# Altium PCB www.PcbDoc
Units mm, origin at the board's own origin, x right, y up, seen from the top; angles counter-clockwise.
Board outline 201.17 x 150.24 mm, 2 copper layers (Top Layer, Bottom Layer); 52 components, 72 nets, 248 pads, 0 vias.
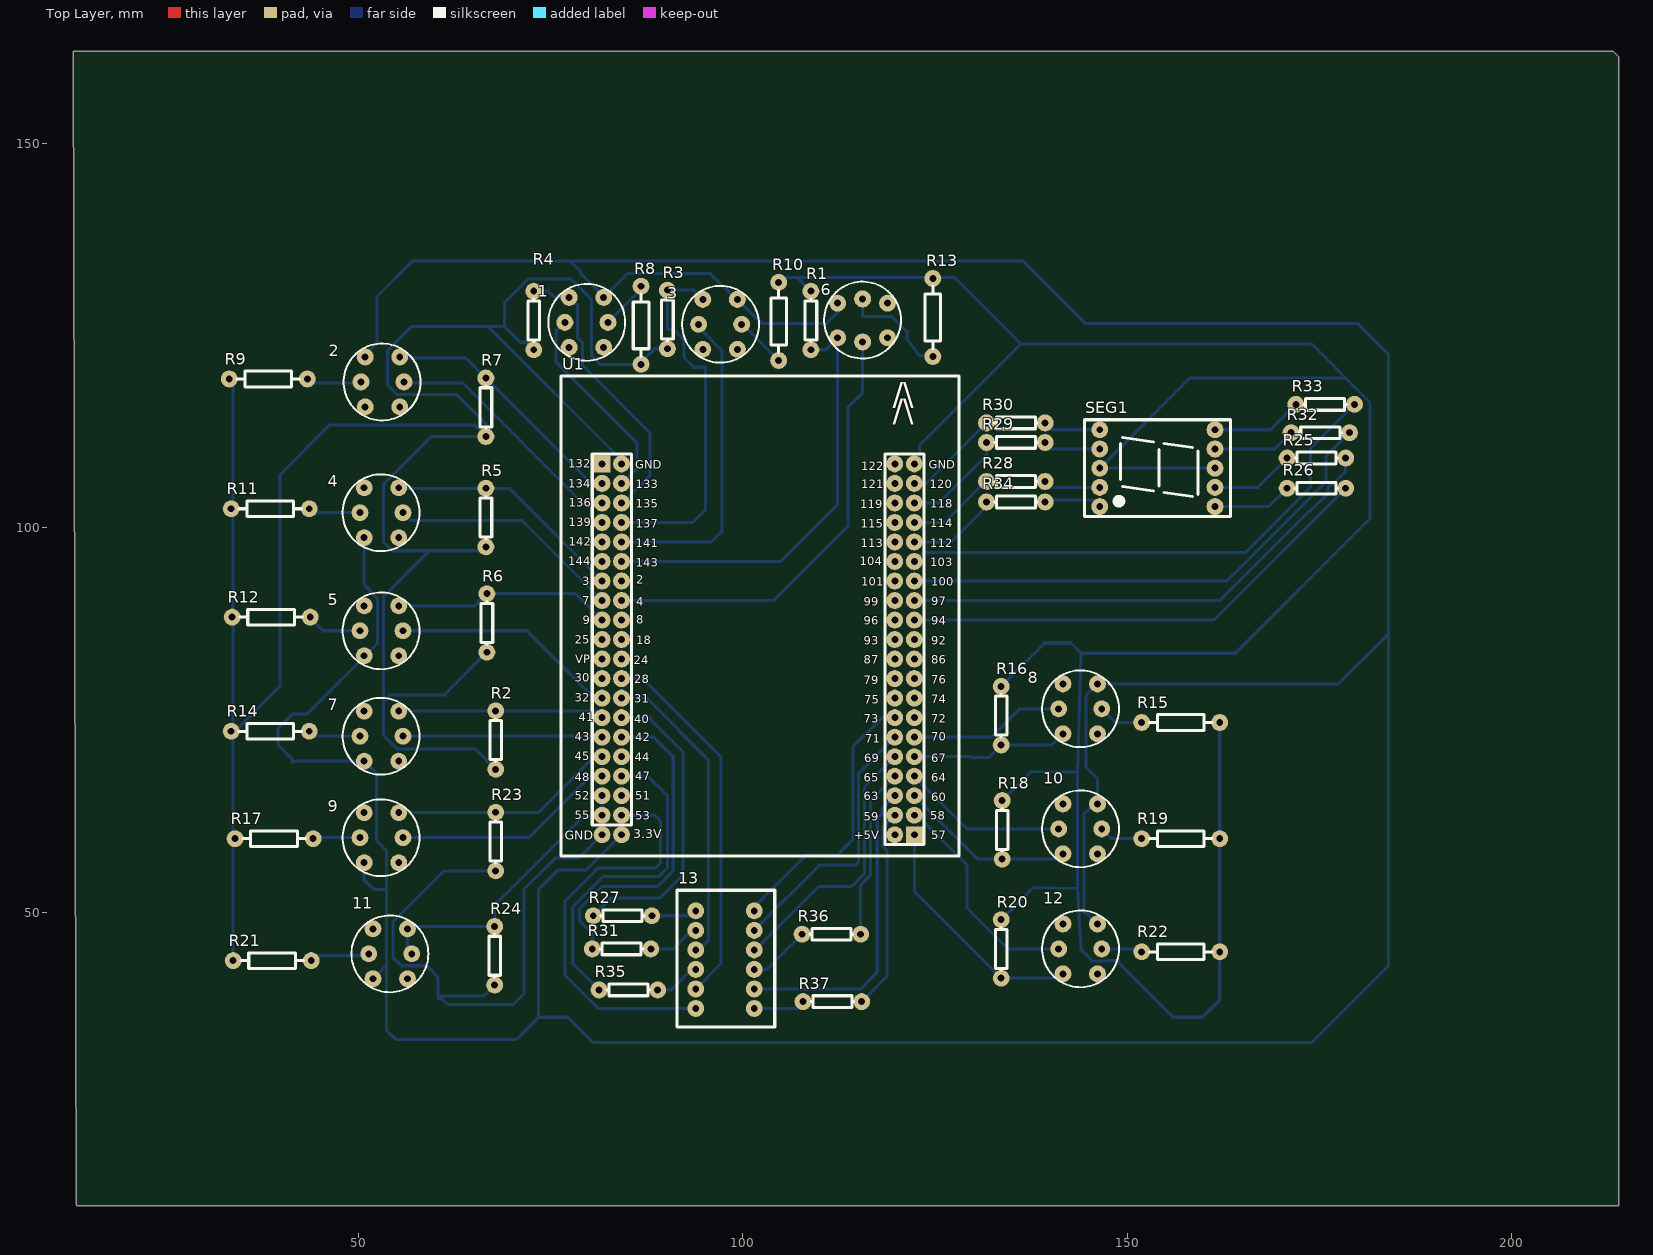
[diagram p0: Top Layer view]
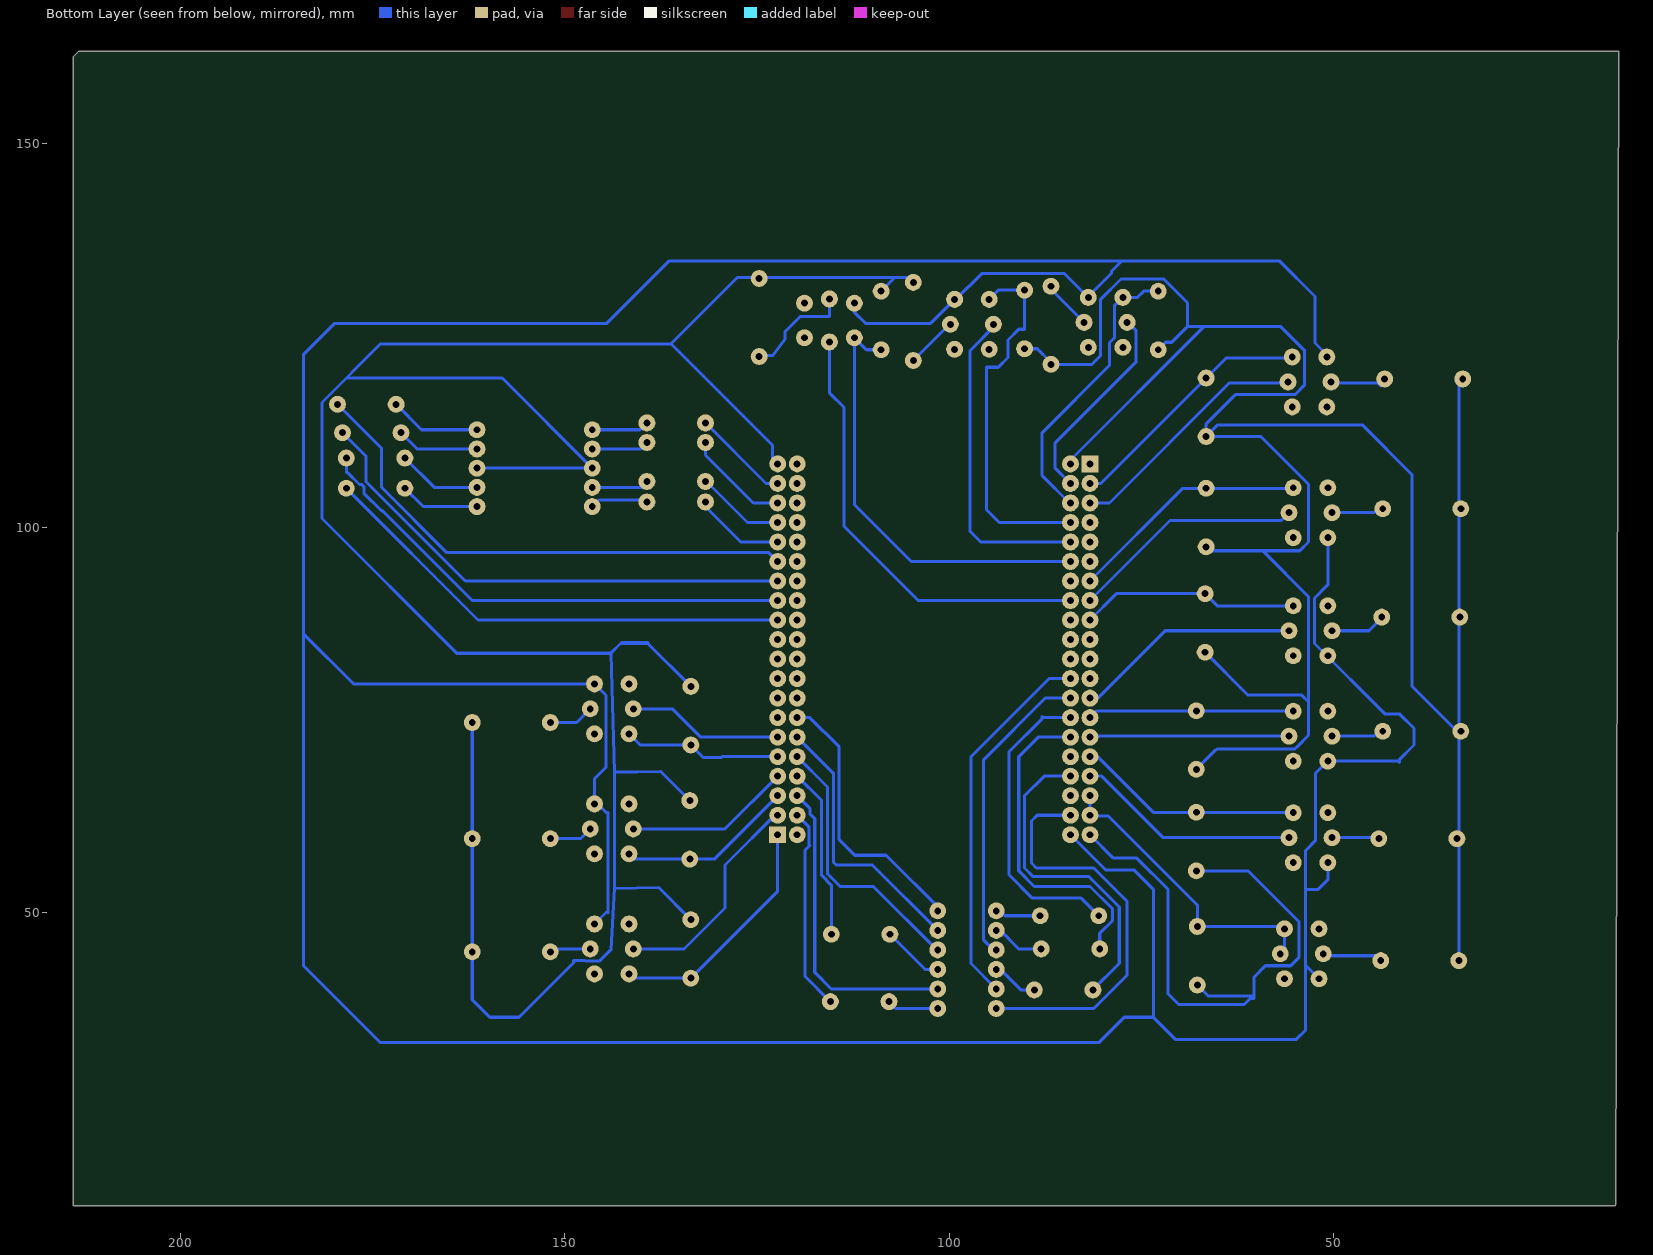
[diagram p1: Bottom Layer view, seen from below]

## Layer stack, top to bottom
Top Layer: signal copper 0.0356
Dielectric: dielectric 0.32, FR-4, Dk 4.8
Bottom Layer: signal copper 0.0356

## Board outline
12.827,162.052 213.233,162.052 213.995,161.29 213.995,11.811 13.335,11.811 13.208,11.938

## Design rules (kind name [scope] priority, off if disabled: settings)
Clearance [All] p1: gap=0.254
FabricationTestpoint [(IsPad And (OnTopLayer Or OnBottomLayer))] p1: side=3 testpointundercomponent=TRUE minsize=1.016 maxsize=2.54 preferedsize=1.524 minholesize=0 maxholesize=1.016 preferedholesize=0.813 testpointgrid=0.025 allowsidetop=TRUE allowsidebottom=TRUE usegrid=TRUE gridtolerance=0
PolygonConnect [All] p1: connectstyle=Relief reliefconductorwidth=0.254 reliefentries=4 polygonreliefangle="90 Angle"
RoutingVias [All] p1: holewidth=0.711 width=1.27 viastyle="Through Hole" minholewidth=0.711 minwidth=1.27 maxholewidth=0.711 maxwidth=1.27
SilkscreenOverComponentPads [All] p1: minsilkscreentomaskgap=0.254
SolderMaskExpansion [All] p1: expansion=0.102
Width [All] p1: maxlimit=0.5 minlimit=0.4 preferedwidth=0.4
26 further rules are at their usual default settings.

## Components (designator, comment, footprint, x,y, rotation, side; value= is the part's Value field where it differs from the comment)
1 "K2" KG 79.629,126.746 r0 top
2 "K1" KG 53.086,118.999 r180 top
3 "K4" KG 97.028,126.492 r0 top
4 "K3" KG 52.959,101.981 r180 top
5 "K5" KG 52.959,86.614 r180 top
6 "K6" KG 115.57,127 r90 top
7 "K7" KG 52.959,72.898 r180 top
8 "K8" KG 143.891,76.454 r0 top
9 "K9" KG 52.959,59.69 r180 top
10 "K10" KG 143.891,60.833 r0 top
11 "K11" KG 54.102,44.577 r180 top
12 "K12" KG 143.891,45.212 r0 top
13 "DZ" DZ 97.663,43.815 r0 top
R1 "Res1" AXIAL-0.3 108.839,127 r90 top
R2 "Res1" AXIAL-0.3 67.818,72.39 r270 top
R3 "Res1" AXIAL-0.3 90.17,127.127 r270 top
R4 "Res1" AXIAL-0.3 72.771,127 r270 top
R5 "Res1" AXIAL-0.3 66.548,101.346 r270 top
R6 "Res1" AXIAL-0.3 66.675,87.63 r270 top
R7 "Res1" AXIAL-0.3 66.548,115.697 r270 top
R8 "Res2" AXIAL-0.4 86.741,126.365 r270 top
R9 "Res2" AXIAL-0.4 38.227,119.38 r0 top
R10 "Res2" AXIAL-0.4 104.648,126.873 r90 top
R11 "Res2" AXIAL-0.4 38.481,102.489 r0 top
R12 "Res2" AXIAL-0.4 38.608,88.392 r0 top
R13 "Res2" AXIAL-0.4 124.714,127.381 r90 top
R14 "Res2" AXIAL-0.4 38.481,73.533 r0 top
R15 "Res2" AXIAL-0.4 156.972,74.676 r0 top
R16 "Res1" AXIAL-0.3 133.604,75.565 r90 top
R17 "Res2" AXIAL-0.4 38.989,59.563 r0 top
R18 "Res1" AXIAL-0.3 133.731,60.706 r90 top
R19 "Res2" AXIAL-0.4 156.972,59.563 r0 top
R20 "Res1" AXIAL-0.3 133.604,45.212 r90 top
R21 "Res2" AXIAL-0.4 38.735,43.688 r0 top
R22 "Res2" AXIAL-0.4 156.972,44.831 r0 top
R23 "Res1" AXIAL-0.3 67.818,59.182 r90 top
R24 "Res1" AXIAL-0.3 67.691,44.323 r90 top
R25 "Res1" AXIAL-0.3 174.625,109.093 r180 top
R26 "Res1" AXIAL-0.3 174.625,105.156 r180 top
R27 "Res1" AXIAL-0.3 84.328,49.53 r180 top
R28 "Res1" AXIAL-0.3 135.509,106.045 r0 top
R29 "Res1" AXIAL-0.3 135.509,111.125 r0 top
R30 "Res1" AXIAL-0.3 135.509,113.665 r0 top
R31 "Res1" AXIAL-0.3 84.201,45.212 r180 top
R32 "Res1" AXIAL-0.3 175.133,112.395 r180 top
R33 "Res1" AXIAL-0.3 175.768,116.078 r180 top
R34 "Res1" AXIAL-0.3 135.509,103.378 r0 top
R35 "Res1" AXIAL-0.3 85.09,39.878 r180 top
R36 "Res1" AXIAL-0.3 111.506,47.117 r180 top
R37 "Res1" AXIAL-0.3 111.633,38.354 r180 top
SEG1 "Displayer-SEG-7" QH5011AS 146.431,112.776 r270 top
U1 "EP2" EP2-TQFP144 81.661,108.331 r0 top

## Footprints (in the part's own frame and the unit in brackets; to place one, negate y for a bottom-side part, rotate by r counter-clockwise, add the part's x,y. Pads: shape width x height; smd on the part's side, far side on the other; paste and mask are expansions set on the pad)
AXIAL-0.3 [mm] "Axial Device, Thru-Hole; 2 Leads; 0.3 in Pin Spacing"
  round 2.2 hole 0.9 unplated: 1(-3.81,0) 2(3.81,0)
  silkscreen extent -2.77,-0.76 2.77,0.76
AXIAL-0.4 [mm] "Axial Device, Thru-Hole; 2 Leads; 0.4 in Pin Spacing"
  round 2.2 hole 0.9 unplated: 1(-5.08,0) 2(5.08,0)
  silkscreen extent -4.06,-1.02 4.06,1.02
DZ [mm]
  round 2.2 hole 0.9 unplated: 1(-3.81,6.35) 2(-3.81,3.81) 3(-3.81,1.27) 4(-3.81,-1.27) 5(-3.81,-3.81) 6(-3.81,-6.35) 7(3.81,-6.35) 8(3.81,-3.81) 9(3.81,-1.27) 10(3.81,1.27) 11(3.81,3.81) 12(3.81,6.35)
  silkscreen extent -6.22,-8.75 6.48,9.03
EP2-TQFP144 [mm]
  rect 2.2x2.2 hole 0.9 unplated: 1(0,0) 59(40.64,-48.26)
  round 2.2 hole 0.9 unplated: 2(0,-2.54) 3(0,-5.08) 4(0,-7.62) 5(0,-10.16) 6(0,-12.7) 7(0,-15.24) 8(0,-17.78) 9(0,-20.32) 10(0,-22.86) 11(0,-25.4) 12(0,-27.94) 13(0,-30.48) 14(0,-33.02) 15(0,-35.56) 16(0,-38.1) 17(0,-40.64) 18(0,-43.18) 19(0,-45.72) 20(2.54,-45.72) 21(2.54,-43.18) 22(2.54,-40.64) 23(2.54,-38.1) 24(2.54,-35.56) 25(2.54,-33.02) 26(2.54,-30.48) 27(2.54,-27.94) 28(2.54,-25.4) 29(2.54,-22.86) 30(2.54,-20.32) 31(2.54,-17.78) 32(2.54,-15.24) 33(2.54,-12.7) 34(2.54,-10.16) 35(2.54,-7.62) 36(2.54,-5.08) 37(2.54,-2.54) 38(2.54,0) 39(38.1,0) 40(38.1,-2.54) 41(38.1,-5.08) 42(38.1,-7.62) 43(38.1,-10.16) 44(38.1,-12.7) 45(38.1,-15.24) 46(38.1,-17.78) 47(38.1,-20.32) 48(38.1,-22.86) 49(38.1,-25.4) 50(38.1,-27.94) 51(38.1,-30.48) 52(38.1,-33.02) 53(38.1,-35.56) 54(38.1,-38.1) 55(38.1,-40.64) 56(38.1,-43.18) 57(38.1,-45.72) 58(38.1,-48.26) 60(40.64,-45.72) 61(40.64,-43.18) 62(40.64,-40.64) 63(40.64,-38.1) 64(40.64,-35.56) 65(40.64,-33.02) 66(40.64,-30.48) 67(40.64,-27.94) 68(40.64,-25.4) 69(40.64,-22.86) 70(40.64,-20.32) 71(40.64,-17.78) 72(40.64,-15.24) 73(40.64,-12.7) 74(40.64,-10.16) 75(40.64,-7.62) 76(40.64,-5.08) 77(40.64,-2.54) 78(40.64,0) 79(0,-48.26) 80(2.54,-48.26)
  silkscreen extent -5.33,-51.05 46.48,11.43
KG [mm] "3.3V"
  round 2.2 hole 0.9 unplated: 1(-2.25,3.25) 2(-2.25,-3.25) 3(2.25,3.25) 4(2.25,-3.25) 5(-2.8,0) 6(2.8,0)
  silkscreen extent -4.95,-4.99 5.05,5.01
QH5011AS [mm]
  round 2.2 hole 0.9 unplated: a(7.5,15) b(10,15) c(7.5,0) com(5,15) com(5,0) d(2.5,0) e(0,0) f(2.5,15) g(0,15) h(10,0)
  silkscreen extent -1.3,-2 11.3,17

## Part data
1 2 3 4 5 6 7 8 9 10 11 12: library part Component_1
R1 R2 R3 R4 R5 R6 R7 R8 R9 R10 R11 R12 R13 R14 R15 R16 R17 R18 R19 R20 R21 R22 R23 R24 R25 R26 R27 R28 R29 R30 R31 R32 R33 R34 R35 R36 R37: "Resistor"
SEG1: "七段"
U1: "适用于连接西南交"

## Nets (pads, with @x,y where several pads share a name; then routed paths per layer and width w, separated by ;. In a path a pad name is that pad's centre, name@x,y a point inside that pad or via, vN(x,y) a via of type N, cw(c..) or ccw(c..) an arc to the next point about the centre after c; other vN are vias at no path point)
GND: R23.1 R24.1 U1.79 | length 77
  Bottom Layer w0.4: 60.472,39.096 66.274,39.096 R24.1 ; R23.1 61.087,55.372 54.483,48.768 54.483,44.069 55.529,43.023 58.831,43.023 60.325,41.529 60.325,38.735 60.833,38.735 61.595,37.973 70.104,37.973 71.501,39.37 71.501,52.959 75.565,57.023 78.613,57.023 U1.79
Net1_1: 1.1 R4.1 U1.36 | length 37.6
  Bottom Layer w0.4: R4.1 74.676,130.81 75.49,129.996 1.1 78.343,129.032 78.486,129.032 78.486,124.714 79.121,124.079 79.121,121.158 87.884,112.395 87.884,106.807 U1.36@84.328,103.251
Net1_3: 1.3 2.4 3.3 4.3 5.3 6.3 7.3 8.3 9.3 10.3 11.3 12.3 U1.80 | length 603.4
  Bottom Layer w0.4: 2.4@50.582,122.249 52.387,124.054 52.387,130.112 57.023,134.747 77.597,134.747 ; 4.3 50.709,92.583 52.451,90.841 52.451,84.963 43.243,75.755 41.338,75.755 39.497,73.914 39.497,71.755 41.402,69.85 41.402,69.469 41.581,69.648 7.3 52.324,68.033 52.324,59.295 53.594,58.025 53.594,34.671 54.864,33.401 70.485,33.401 73.406,36.322 ; 9.3@51.396,56.44 9.3 50.709,54.193 51.943,52.959 53.594,52.959 ; 11.3 53.586,43.061 ; 1.3 84.979,133.096 95.758,133.096 99.112,129.742 3.3 102.401,126.619 110.871,126.619 112.32,128.068 6.3 ; 1.3@81.879,130.123 78.867,133.135 78.867,133.402 77.597,134.672 77.597,134.747 ; U1.80 79.629,55.499 75.946,55.499 73.406,52.959 73.406,36.322 ; 144.399,49.911 144.399,62.953 ; 144.653,49.95 12.3 ; 144.653,62.992 145.744,64.083 10.3 146.141,67.346 144.653,68.834 144.653,78.216 8.3 177.494,79.704 183.896,86.106 184.023,86.106 ; 73.406,36.322 77.216,36.322 80.518,33.02 173.99,33.02 184.023,43.053 184.023,122.555 179.959,126.619 144.526,126.619 136.398,134.747 77.597,134.747
Net1_5: 1.5 U1.37 | length 26.8
  Bottom Layer w0.4: 1.5@76.829,126.873 75.692,125.736 75.692,121.539 86.233,110.998 86.233,107.823 U1.37
Net1_6: 1.6 R8.1 | length 6.3
  Bottom Layer w0.4: 1.6 R8.1@86.868,131.185
Net2_2: 2.2 R7.1 U1.2 | length 33.6
  Bottom Layer w0.4: 2.2@55.209,122.122 63.933,122.122 R7.1 ; R7.1@66.294,119.761 R7.1 ; U1.2 80.264,105.791 R7.1
Net2_5: 2.5 U1.3 | length 32.4
  Bottom Layer w0.4: 2.5@55.759,118.872 63.5,118.872 79.121,103.251 U1.3
Net2_6: 2.6 R9.2 | length 7.6
  Bottom Layer w0.4: R9.2 43.815,118.872 43.815,118.491 44.196,118.872 2.6@50.159,118.872
Net3_1: 3.1 R3.1 U1.35 | length 48.2
  Bottom Layer w0.4: U1.35 93.472,100.711 95.123,102.362 95.123,120.904 93.599,120.904 92.329,122.174 92.329,124.46 90.932,125.857 90.17,125.857 R3.1@90.17,130.429 ; R3.1 93.583,130.937 3.1
Net3_5: 3.5 U1.34 | length 41.8
  Bottom Layer w0.4: U1.34 95.885,98.171 97.282,99.568 97.282,123.063 94.228,126.117 3.5
Net3_6: 3.6 R10.1 | length 6.8
  Bottom Layer w0.4: 3.6 99.949,126.492 R10.1
Net4_2: 4.2 R5.1 U1.7 | length 31.5
  Bottom Layer w0.4: 4.2 55.284,105.156 R5.1 69.596,105.156 U1.7
Net4_5: 4.5 U1.8 | length 30.6
  Bottom Layer w0.4: 4.5 56.775,100.965 71.247,100.965 U1.8
Net4_6: 4.6 R11.2 | length 6.7
  Bottom Layer w0.4: R11.2@43.815,102.87 44.704,101.981 4.6
Net5_2: 5.2 R6.1 U1.9 | length 28.5
  Bottom Layer w0.4: 5.2 65.099,89.864 R6.1 78.232,91.44 U1.9
Net5_5: 5.5 U1.13 | length 29.5
  Bottom Layer w0.4: 5.5 71.882,86.614 80.645,77.851 U1.13
Net5_6: 5.6 R12.2 | length 7
  Bottom Layer w0.4: R12.2@43.815,88.138 45.339,86.614 5.6
Net6_1: 6.1 R1.1 U1.33 | length 57
  Bottom Layer w0.4: U1.33 104.902,95.631 112.32,103.049 6.1 110.76,123.19 R1.1
Net6_5: 6.5 U1.31 | length 58.2
  Bottom Layer w0.4: U1.31 104.013,90.551 113.665,100.203 113.665,115.697 115.57,117.602 6.5
Net6_6: 6.6 R13.1 | length 14.3
  Bottom Layer w0.4: 6.6 115.57,127.508 119.38,127.508 121.353,125.535 121.353,124.525 122.942,122.428 R13.1@124.714,122.428
Net7_2: 7.2 R2.1 U1.14 | length 26.8
  Bottom Layer w0.4: 7.2 55.261,76.2 R2.1 80.772,76.2 U1.14
Net7_5: 7.5 U1.15 | length 26
  Bottom Layer w0.4: 7.5 81.534,72.898 U1.15
Net7_6: 7.6 R14.2 | length 6.7
  Bottom Layer w0.4: R14.2@43.815,73.787 44.704,72.898 7.6
Net8_2: 8.2 R16.1 U1.63 | length 20.7
  Bottom Layer w0.4: U1.63 129.54,70.231 129.667,70.104 131.953,70.104 R16.1 140.192,71.755 8.2
Net8_5: 8.5 U1.64 | length 20.3
  Bottom Layer w0.4: U1.64 132.334,72.771 136.017,76.454 8.5
Net8_6: 8.6 R15.1 | length 5.9
  Bottom Layer w0.4: 8.6 148.469,74.676 R15.1
Net9_2: 9.2 R23.2 U1.16 | length 28.5
  Bottom Layer w0.4: 9.2 55.261,62.992 R23.2 73.406,62.992 U1.16@80.645,70.231
Net9_5: 9.5 U1.17 | length 29.2
  Bottom Layer w0.4: 9.5 72.136,59.69 80.137,67.691 U1.17
Net9_6: 9.6 R17.2 | length 6.4
  Bottom Layer w0.4: R17.2@43.815,59.817 43.942,59.69 9.6
Net10_2: 10.2 R18.1 U1.61 | length 23
  Bottom Layer w0.4: U1.61 130.556,56.896 R18.1 140.954,56.896 10.2
Net10_5: 10.5 U1.62 | length 21.6
  Bottom Layer w0.4: U1.62 129.159,60.833 10.5
Net10_6: 10.6 R19.1 | length 5.7
  Bottom Layer w0.4: 10.6 147.961,59.563 R19.1
Net11_2: 11.2 11.5 R24.2 U1.18 U1.19 | length 38.9
  Bottom Layer w0.4: 11.2 56.352,45.127 11.5 ; 11.2@56.658,48.133 R24.2 ; R24.2@67.385,47.827 R24.2 ; U1.19@81.534,62.484 79.248,62.484 67.691,50.927 R24.2 ; U1.19 U1.18
Net11_6: 11.6 R21.2 | length 7.6
  Bottom Layer w0.4: R21.2@43.815,44.323 51.048,44.323 11.6
Net12_2: 12.2 R20.1 U1.59 | length 32.4
  Bottom Layer w0.4: U1.59 122.301,52.705 R20.1 ; R20.1@134.164,41.962 R20.1 ; 12.2 141.081,41.402 R20.1
Net12_5: 12.5 U1.60 | length 29.4
  Bottom Layer w0.4: U1.60@122.301,62.992 129.159,56.134 129.159,50.546 134.493,45.212 12.5
Net12_6: 12.6 R22.1 | length 5.4
  Bottom Layer w0.4: 12.6 151.511,45.212 R22.1
Net13_1: 13.1 R27.1 | length 5.5
  Bottom Layer w0.4: R27.1 92.71,49.53 13.1@93.345,50.165
Net13_2: 13.2 R31.1 | length 6.3
  Bottom Layer w0.4: R31.1 90.932,45.212 13.2@93.345,47.625
Net13_4: 13.4 R35.1 | length 5.5
  Bottom Layer w0.4: R35.1 90.678,39.878 13.4@93.345,42.545
Net13_7: 13.7 R37.2 | length 7.2
  Bottom Layer w0.4: 13.7@100.965,37.465 106.934,37.465 R37.2
Net13_9: 13.9 R36.2 | length 8.6
  Bottom Layer w0.4: 13.9@100.965,42.545 103.124,42.545 R36.2
NETLABEL1: R27.2 U1.25 | length 40
  Bottom Layer w0.4: R27.2 82.804,51.816 89.154,51.816 92.202,54.864 92.202,70.866 87.884,75.184 87.884,75.438 87.757,75.311 U1.25
NETLABEL2: R31.2 U1.24 | length 42.8
  Bottom Layer w0.4: R31.2 80.391,47.244 78.74,48.895 78.74,50.419 81.661,53.34 88.9,53.34 90.932,55.372 90.932,70.231 88.392,72.771 U1.24
NETLABEL3: 13.3 U1.26 | length 40.8
  Bottom Layer w0.4: U1.26 87.503,77.851 95.504,69.85 95.504,46.355 94.234,45.085 13.3@93.345,45.085
NETLABEL4: R35.2 U1.22 | length 43.1
  Bottom Layer w0.4: R35.2 77.851,43.307 77.851,50.673 81.788,54.61 89.027,54.61 90.17,55.753 90.17,65.151 87.63,67.691 U1.22
NETLABEL5: 13.5 U1.27 | length 49.3
  Bottom Layer w0.4: U1.27 86.995,80.391 97.155,70.231 97.155,43.307 13.5 13.5@93.345,40.005
NETLABEL6: 13.6 U1.20 | length 53.3
  Bottom Layer w0.4: U1.20 88.519,62.611 89.281,61.849 89.281,56.388 88.646,55.753 81.153,55.753 76.835,51.435 76.835,41.783 81.153,37.465 82.55,37.465 13.6@93.345,37.465
NETLABEL7: 13.12 U1.52 | length 36.3
  Bottom Layer w0.4: 13.12@100.965,50.165 108.204,57.404 112.268,57.404 114.3,59.436 114.3,71.501 118.11,75.311 U1.52
NETLABEL8: 13.11 U1.53 | length 36
  Bottom Layer w0.4: 13.11@100.965,47.625 13.11 109.982,56.134 114.681,56.134 115.062,56.515 115.062,68.072 U1.53
NETLABEL9: 13.10 U1.54 | length 35.8
  Bottom Layer w0.4: 13.10@100.965,45.085 101.6,45.085 109.855,53.34 114.173,53.34 115.824,54.991 115.824,66.294 U1.54
NETLABEL10: R36.1 U1.55 | length 22.4
  Bottom Layer w0.4: R36.1 115.316,53.511 116.586,54.781 116.586,64.516 U1.55
NETLABEL11: 13.8 U1.56 | length 41.3
  Bottom Layer w0.4: 13.8@100.965,40.005 115.316,40.005 117.475,42.164 117.475,62.147 118.11,62.782 118.11,63.5 U1.56
NETLABEL12: R37.1 U1.57 | length 26.6
  Bottom Layer w0.4: R37.1 118.745,41.656 118.745,58.058 118.129,58.674 118.207,58.752 118.207,61.057 U1.57
NETLABEL13: R30.1 U1.77 | length 12.7
  Bottom Layer w0.4: U1.77 123.825,105.791 R30.1
NETLABEL14: R29.1 U1.76 | length 13.6
  Bottom Layer w0.4: U1.76 125.476,103.251 131.699,109.474 R29.1
NETLABEL15: R28.1 U1.75 | length 11.6
  Bottom Layer w0.4: U1.75 126.238,100.711 131.572,106.045 R28.1
NETLABEL16: R34.1 U1.74 | length 12.2
  Bottom Layer w0.4: U1.74 127.127,98.171 131.699,102.743 R34.1@131.699,103.632
NETLABEL17: R33.1 U1.73 | length 68.7
  Bottom Layer w0.4: U1.73 123.444,96.774 165.354,96.774 173.863,105.283 173.863,110.363 R33.1
NETLABEL18: R32.1 U1.72 | length 66.6
  Bottom Layer w0.4: U1.72 162.941,93.091 175.895,106.045 175.895,109.347 R32.1
NETLABEL19: R25.1 U1.71 | length 65.4
  Bottom Layer w0.4: U1.71 162.052,90.551 173.736,102.235 173.863,102.235 176.149,104.521 176.149,105.374 176.421,105.646 176.727,105.646 178.269,107.188 178.435,107.188 R25.1
NETLABEL20: R26.1 U1.70 | length 63.6
  Bottom Layer w0.4: U1.70@122.555,87.757 U1.70 161.29,88.011 R26.1
NetR1_2: R1.2 R10.2 R13.2 R15.2 R16.2 R18.2 R19.2 R20.2 R22.2 SEG1.com U1.78 | length 357.7
  Bottom Layer w0.4: R10.2 105.283,132.588 107.061,132.588 ; R1.2 107.061,132.588 ; U1.78@121.58,108.331 U1.78 122.955,108.985 122.955,110.725 136.181,123.952 ; R20.2 137.795,53.213 143.51,53.086 ; R16.2 139.192,84.963 142.748,84.963 ; R18.2 137.541,68.326 143.51,68.199 ; 139.192,85.09 142.621,85.09 142.748,84.963 ; SEG1.com@161.431,107.776 146.431,107.776 158.162,119.507 178.435,119.507 ; R15.2 162.052,38.608 159.766,36.322 155.956,36.322 148.844,43.434 148.844,43.688 147.365,43.688 147.335,43.658 145.445,43.658 144.018,45.085 143.51,53.086 ; 107.061,132.588 127.545,132.588 136.181,123.952 ; 136.181,123.952 173.99,123.952 181.61,116.332 181.61,101.219 164.084,83.693 144.018,83.693 ; 142.748,84.963 144.018,83.693 ; 143.51,53.086 143.51,68.199 ; 143.51,68.199 144.018,83.693
NetR2_2: R2.2 R3.2 R4.2 R5.2 R6.2 R7.2 R8.2 R9.1 R11.1 R12.1 R14.1 R17.1 R21.1 U1.38 | length 343.6
  Bottom Layer w0.4: R9.1 33.655,118.872 R21.1@33.655,44.323 ; R14.1@33.909,73.533 39.751,79.375 39.751,106.934 46.228,113.411 65.024,113.411 R7.2 ; 53.213,77.343 54.102,78.232 61.087,78.232 R6.2 ; 59.118,96.965 53.213,91.059 53.213,73.025 54.642,71.596 54.991,71.247 65.151,71.247 ; 65.278,71.12 R2.2 ; R5.2 66.04,97.028 54.356,97.028 53.213,98.171 53.213,105.664 59.436,111.887 R7.2 ; R4.2 71.801,124.16 71.018,124.16 ; U1.38 84.201,108.839 66.802,126.238 ; R8.2@86.741,121.793 86.995,121.793 88.519,123.317 R3.2 ; R8.2@86.868,121.92 86.233,121.285 81.407,121.285 80.264,122.428 80.264,129.75 77.625,132.39 72.065,132.39 68.961,129.286 68.961,126.217 71.018,124.16 ; R7.2 66.548,113.538 62.738,117.348 54.991,117.348 53.721,118.618 53.721,123.063 56.896,126.238 66.802,126.238 ; 66.802,126.238 68.94,126.238 71.018,124.16
NetR25_2: R25.2 SEG1.a | length 11
  Bottom Layer w0.4: SEG1.a 166.998,105.276 R25.2
NetR26_2: R26.2 SEG1.b | length 10.4
  Bottom Layer w0.4: SEG1.b 168.435,102.776 R26.2
NetR28_2: R28.2 SEG1.c | length 7.4
  Bottom Layer w0.4: R28.2 140.088,105.276 SEG1.c
NetR29_2: R29.2 SEG1.d | length 7.5
  Bottom Layer w0.4: R29.2 140.168,110.276 SEG1.d
NetR30_2: R30.2 SEG1.e | length 7.5
  Bottom Layer w0.4: R30.2 140.208,112.776 SEG1.e
NetR32_2: R32.2 SEG1.f | length 10.8
  Bottom Layer w0.4: SEG1.f 169.204,110.276 R32.2
NetR33_2: R33.2 SEG1.g | length 11.9
  Bottom Layer w0.4: SEG1.g 168.656,112.776 R33.2
NetR34_2: R34.2 SEG1.h | length 7.5
  Bottom Layer w0.4: R34.2@139.319,103.632 145.575,103.632 SEG1.h
pads on no net: 1.2 1.4 2.1 2.3 3.2 3.4 4.1 4.4 5.1 5.4 6.2 6.4 7.1 7.4 8.1 8.4 9.1 9.4 10.1 10.4 11.1 11.4 12.1 12.4 U1.1 U1.4 U1.5 U1.6 U1.10 U1.11 U1.12 U1.21 U1.23 U1.28 U1.29 U1.30 U1.32 U1.39 U1.40 U1.41 U1.42 U1.43 U1.44 U1.45 U1.46 U1.47 U1.48 U1.49 U1.50 U1.51 U1.58 U1.65 U1.66 U1.67 U1.68 U1.69

## Text inside footprints (layer, text, board x,y; h text height)
U1: Top Overlay "8" at 86.131,87.528 h1.1; Top Overlay "3.3V" at 85.75,59.639 h1.2; Top Overlay "133" at 86.055,105.154 h1.1; Top Overlay "135" at 86.055,102.601 h1.1; Top Overlay "137" at 86.055,100.049 h1.1; Top Overlay "141" at 86.055,97.496 h1.1; Top Overlay "143" at 86.055,94.944 h1.1; Top Overlay "2" at 86.131,92.71 h1.1; Top Overlay "4" at 86.131,89.84 h1.1; Top Overlay "18" at 86.131,84.861 h1.1; Top Overlay "24" at 85.776,82.271 h1.1; Top Overlay "28" at 85.852,79.756 h1.1; Top Overlay "31" at 85.877,77.216 h1.1; Top Overlay "40" at 85.852,74.6 h1.1; Top Overlay "42" at 85.954,72.263 h1.1; Top Overlay "44" at 85.903,69.621 h1.1; Top Overlay "47" at 85.979,67.157 h1.1; Top Overlay "51" at 85.979,64.605 h1.1; Top Overlay "53" at 85.979,62.052 h1.1; Top Overlay "GND" at 85.979,107.696 h1.1; Top Overlay "GND" at 76.81,59.411 h1.2; Top Overlay "48" at 78.139,67.031 h1.1; Top Overlay "134" at 77.255,105.232 h1.1; Top Overlay "136" at 77.36,102.779 h1.1; Top Overlay "139" at 77.36,100.227 h1.1; Top Overlay "142" at 77.307,97.674 h1.1; Top Overlay "144" at 77.255,95.122 h1.1; Top Overlay "3" at 79.093,92.569 h1.1; Top Overlay "7" at 79.093,90.016 h1.1; Top Overlay "9" at 79.146,87.464 h1.1; Top Overlay "25" at 78.114,84.911 h1.1; Top Overlay "VP" at 78.156,82.398 h1.1; Top Overlay "30" at 78.139,79.959 h1.1; Top Overlay "32" at 78.139,77.406 h1.1; Top Overlay "41" at 78.611,74.854 h1.1; Top Overlay "43" at 78.139,72.301 h1.1; Top Overlay "45" at 78.139,69.748 h1.1; Top Overlay "52" at 78.139,64.631 h1.1; Top Overlay "55" at 78.139,62.078 h1.1; Top Overlay "132" at 77.267,107.798 h1.1; Top Overlay "/\" at 119.507,115.951 h3; Top Overlay "/\" at 119.507,113.792 h3; Top Overlay "104" at 115.189,95.123 h1.1; Top Overlay "122" at 115.418,107.518 h1.1; Top Overlay "+5V" at 114.452,59.461 h1.1; Top Overlay "113" at 115.313,97.471 h1.1; Top Overlay "115" at 115.313,100.024 h1.1; Top Overlay "119" at 115.291,102.565 h1.1; Top Overlay "121" at 115.367,105.131 h1.1; Top Overlay "59" at 115.748,61.874 h1.1; Top Overlay "101" at 115.367,92.481 h1.1; Top Overlay "99" at 115.748,89.865 h1.1; Top Overlay "96" at 115.745,87.375 h1.1; Top Overlay "93" at 115.692,84.822 h1.1; Top Overlay "87" at 115.692,82.296 h1.1; Top Overlay "79" at 115.748,79.68 h1.1; Top Overlay "75" at 115.799,77.089 h1.1; Top Overlay "73" at 115.695,74.637 h1.1; Top Overlay "71" at 115.926,72.06 h1.1; Top Overlay "69" at 115.805,69.532 h1.1; Top Overlay "65" at 115.753,66.98 h1.1; Top Overlay "63" at 115.753,64.541 h1.1; Top Overlay "103" at 124.384,94.996 h1.1; Top Overlay "120" at 124.333,105.156 h1.1; Top Overlay "118" at 124.358,102.616 h1.1; Top Overlay "114" at 124.384,100.076 h1.1; Top Overlay "112" at 124.384,97.46 h1.1; Top Overlay "58" at 124.358,62.001 h1.1; Top Overlay "GND" at 124.181,107.671 h1.1; Top Overlay "76" at 124.511,79.717 h1.1; Top Overlay "74" at 124.485,77.19 h1.1; Top Overlay "72" at 124.485,74.637 h1.1; Top Overlay "92" at 124.511,84.822 h1.1; Top Overlay "97" at 124.511,89.928 h1.1; Top Overlay "100" at 124.511,92.48 h1.1; Top Overlay "94" at 124.511,87.375 h1.1; Top Overlay "86" at 124.511,82.296 h1.1; Top Overlay "70" at 124.485,72.288 h1.1; Top Overlay "60" at 124.485,64.414 h1.1; Top Overlay "64" at 124.485,66.954 h1.1; Top Overlay "67" at 124.485,69.494 h1.1; Top Overlay "57" at 124.485,59.461 h1.1